# Altium PCB Copy of Main_Board.PcbDoc (part 4 of 4)
Units mil, origin at the board's own origin, x right, y up, seen from the top; angles counter-clockwise.
Board outline 5818.45 x 4760.12 mil, 4 copper layers (Top Layer, POWER, GROUND, Bottom Layer), stack 30.634 mil thick; 298 components, 323 nets, 1386 pads, 599 vias.
Unrouted connection lines stored in the file: 1.
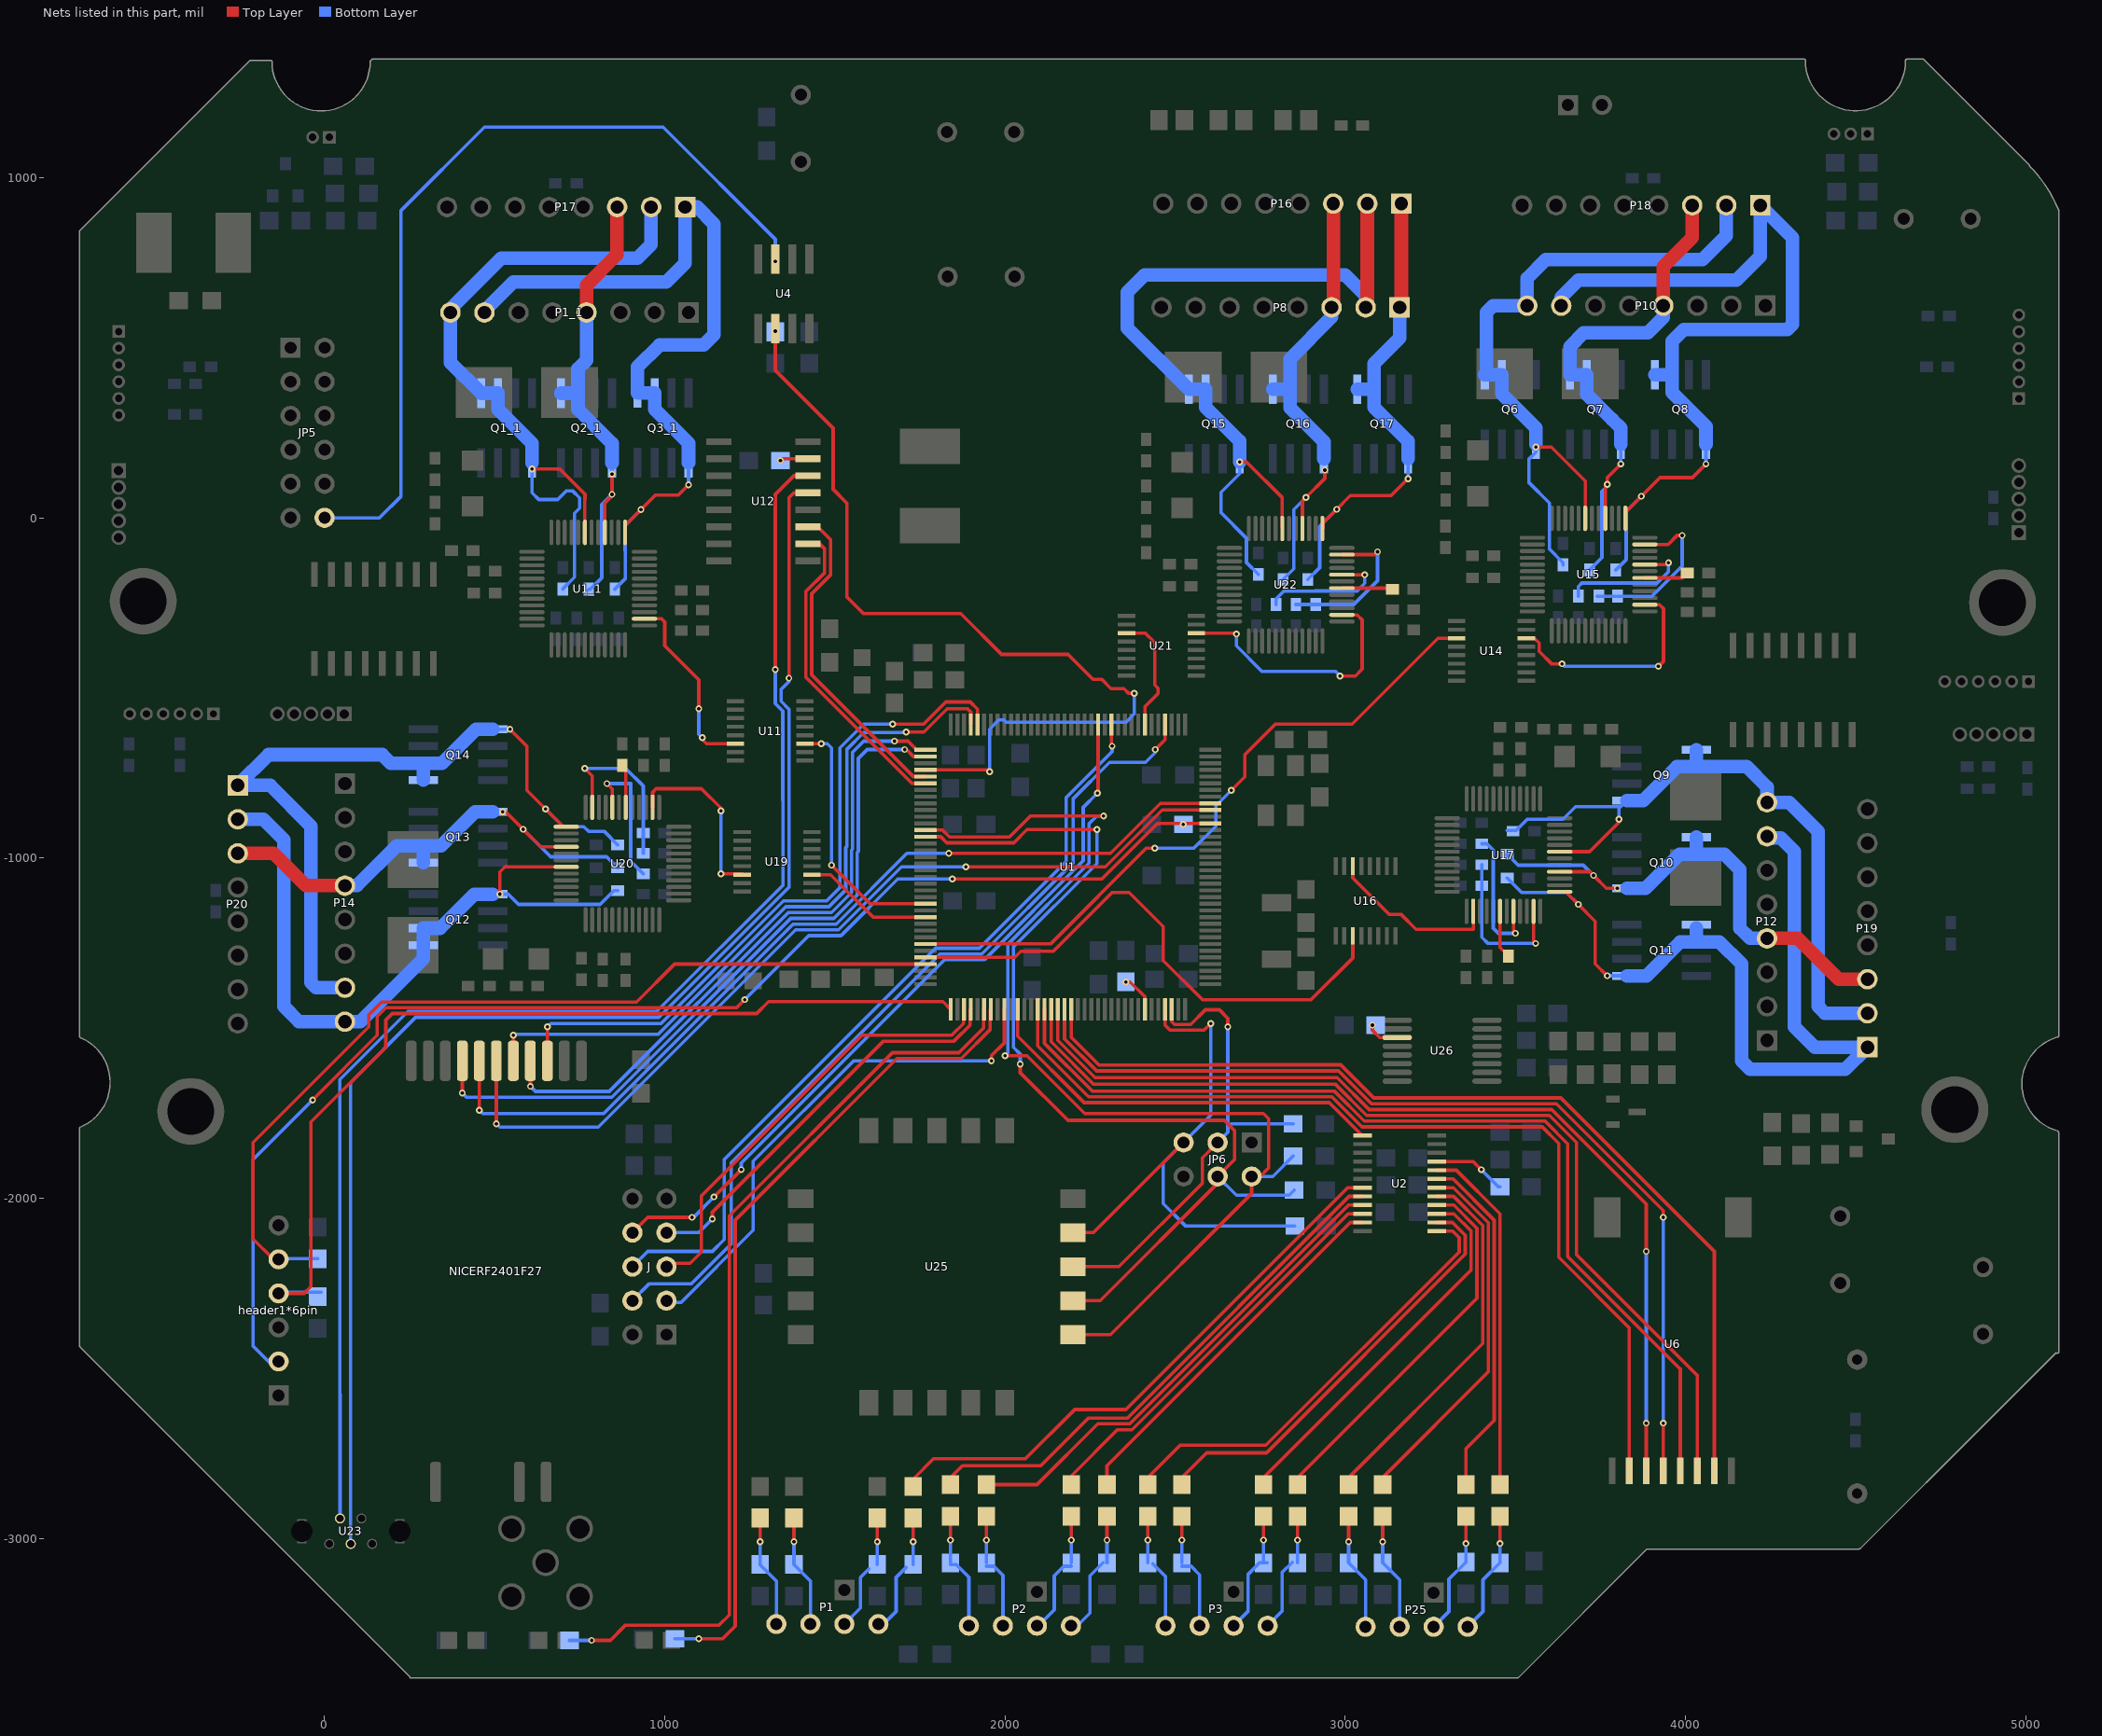
[diagram p6: the nets of this part, all layers, seen from the top]

## Via types
v1: diameter 20, hole 10, Top Layer to Bottom Layer, 507 vias
v2: diameter 25, hole 12, Top Layer to Bottom Layer, 48 vias
v3: diameter 60, hole 40, Top Layer to Bottom Layer, 40 vias
v4: diameter 30, hole 16, Top Layer to Bottom Layer, 3 vias
v5: diameter 32, hole 16, Top Layer to Bottom Layer, 1 vias

## Nets (pads, with @x,y where several pads share a name; then routed paths per layer and width w, separated by ;. In a path a pad name is that pad's centre, name@x,y a point inside that pad or via, vN(x,y) a via of type N, cw(c..) or ccw(c..) an arc to the next point about the centre after c; other vN are vias at no path point) (continued)
NetR28_2: R28.2 U2.7 | length 1696.8
  Top Layer w10: R28.2@1729.99,-2847.08 1729.99,-2826.38 1789.99,-2766.38 2059.99,-2766.38 2204.99,-2621.38 2354.99,-2621.38 3007.2,-1969.18 U2.7@3050.99,-1969.18
NetR29_2: R29.2 U2.8 | length 1574.1
  Top Layer w10: R29.2@1839.99,-2842.08 1839.99,-2821.38 1874.99,-2786.38 2104.99,-2786.38 2244.99,-2646.38 2359.99,-2646.38 3011.61,-1994.77 U2.8@3050.99,-1994.77
NetR30_2: R30.2 U2.9 | length 1446.4
  Top Layer w10: R30.2@1944.99,-2842.08 2094.29,-2842.08 2272.99,-2663.38 2367.03,-2663.38 3010.06,-2020.36 U2.9@3050.99,-2020.36
NetR31_2: R31.2 U2.10 | length 1200.8
  Top Layer w10: R31.2@2194.99,-2842.08 2194.99,-2816.38 2329.99,-2681.38 2373.08,-2681.38 3008.51,-2045.95 U2.10@3050.99,-2045.95
NetR32_2: R32.2 U2.11 | length 1102.8
  Top Layer w10: R32.2@2299.99,-2842.08 2299.99,-2786.38 3014.83,-2071.54 U2.11@3050.99,-2071.54
NetR36_1: R36.1 U2.16 | length 1118.2
  Top Layer w10: R36.1@2859.99,-2842.08 2859.99,-2821.38 3386.99,-2294.38 3386.99,-2088.38 3318.97,-2020.36 U2.16@3268.99,-2020.36
NetR37_1: R37.1 U2.15 | length 1120.3
  Top Layer w10: R37.1@2759.99,-2842.08 2759.99,-2821.38 3369.99,-2211.38 3369.99,-2096.38 3319.56,-2045.95 U2.15@3268.99,-2045.95
NetR38_1: R38.1 U2.14 | length 1280.5
  Top Layer w10: R38.1@2519.99,-2842.08 2519.99,-2821.38 2592.49,-2748.88 2768.45,-2748.88 3352.99,-2164.34 3352.99,-2109.38 3315.15,-2071.54 U2.14@3268.99,-2071.54
NetR39_1: R39.1 U2.13 | length 1326.3
  Top Layer w10: R39.1@2419.99,-2842.08 2419.99,-2821.38 2514.99,-2726.38 2766.91,-2726.38 3334.99,-2158.3 3334.99,-2116.38 3315.74,-2097.13 U2.13@3268.99,-2097.13
NetR42_1: R42.1 U2.21 | length 216.6
  Top Layer w10: U2.21@3268.99,-1892.41 3376.02,-1892.41 v1(3399.99,-1916.38)
  Bottom Layer w10: v1(3399.99,-1916.38) 3449.99,-1966.38 R42.1@3454.99,-1966.38
NetR51_1: R51.1 U26.3 | length 97.1
  Top Layer w10: v1(3079.99,-1491.38) 3079.99,-1506.38 3101.61,-1528 U26.3@3153.1,-1528
NetR63_1: R63.1 U15.20 | length 409.6
  Top Layer w10: U15.20@3880.82,-137.33 3944.99,-137.33 v1(3950.46,-131.85)
  Bottom Layer w10: R63.1@3685.46,-230.35 3685.46,-201.85 3695.46,-191.85 3916.42,-191.85 3950.46,-157.81 v1(3950.46,-131.85)
NetR64_2: R64.2 U15.18 | length 130.8
  Top Layer w10: U15.18@3880.82,-176.7 3990.62,-176.7 R64.2@4005.46,-161.85
NetR65_1: R65.1 R66.2 U15.23 | length 492.2
  Top Layer w10: U15.23@3880.82,-78.27 3949.05,-78.27 3975.46,-51.85 v1(3990.46,-51.85)
  Bottom Layer w10: R65.1@3740.46,-230.35 R65.1@3745.46,-230.35 R66.2@3795.46,-230.35 ; R66.2@3800.46,-230.35 3901.96,-230.35 3990.46,-141.85 v1(3990.46,-51.85)
NetR69_1: R69.1 U17.20 | length 409.2
  Top Layer w10: U17.20@3494.52,-1156.74 3494.52,-1215.91 v1(3499.99,-1221.38)
  Bottom Layer w10: R69.1@3401.49,-958.05 3416.66,-958.05 3434.99,-976.38 3434.99,-1206.38 3449.99,-1221.38 v1(3499.99,-1221.38)
NetR70_2: R70.2 U17.18 | length 141.9
  Top Layer w10: U17.18@3455.15,-1156.74 3455.15,-1263.54 R70.2@3479.99,-1288.38
NetR71_1: R71.1 R72.2 U17.23 | length 476.6
  Top Layer w10: U17.23@3553.57,-1156.74 3553.57,-1244.97 v1(3559.99,-1251.38)
  Bottom Layer w10: R71.1@3401.49,-1019.72 R72.2@3401.49,-1081.38 3401.49,-1232.88 3419.99,-1251.38 v1(3559.99,-1251.38)
NetR75_1: R75.1 U20.20 | length 427.3
  Top Layer w10: v1(829.99,-781.38) 845.74,-797.13 845.74,-851.38 U20.20@846.09,-851.03
  Bottom Layer w10: v1(829.99,-781.38) 899.99,-781.38 899.99,-1009.38 R75.1@936.99,-1046.38
NetR76_2: R76.2 U20.18 | length 127.5
  Top Layer w10: R76.2@874.99,-727.88 885.46,-738.35 U20.18@885.46,-851.03
NetR77_1: R77.1 R78.2 U20.23 | length 515.3
  Top Layer w10: v1(764.99,-736.38) 787.04,-758.43 U20.23@787.04,-851.03
  Bottom Layer w10: v1(764.99,-736.38) 884.99,-736.38 936.99,-788.38 R78.2@936.99,-926.38 R77.1@936.99,-986.38
NetR81_1: R81.1 U22.20 | length 389
  Top Layer w10: U22.20@2990.35,-167.24 v1(3057.63,-167.24)
  Bottom Layer w10: R81.1@2796.66,-254.88 2796.66,-238.22 2819.49,-215.38 2911.71,-215.38 2912.21,-214.88 3034.99,-214.88 3057.63,-192.24 v1(3057.63,-167.24)
NetR82_2: R82.2 U22.18 | length 149.5
  Top Layer w10: U22.18@2990.35,-206.61 3135.22,-206.61 R82.2@3138.49,-209.88
NetR83_1: R83.1 R84.2 U22.23 | length 462.1
  Top Layer w10: U22.23@2990.35,-108.19 3086.68,-108.19 v1(3094.99,-99.88)
  Bottom Layer w10: R83.1@2854.99,-254.88 R84.2@2913.33,-254.88 3024.99,-254.88 3094.99,-184.88 v1(3094.99,-99.88)
NetR98_2: R98.2 U12.7 | length 83.1
  Top Layer w10: v1(1339.99,168.62) 1344.99,173.62 U12.7@1420.99,173.62
NetR101_1: R101.1 U1.138 | length 111.3
  Top Layer w10: v1(2354.99,-1364.38) 2367.99,-1364.38 2411.37,-1407.76 U1.138@2411.37,-1444.69
NetR107_1: R107.1 U2.17 | length 1095.4
  Top Layer w10: R107.1@3009.99,-2842.08 3009.99,-2821.38 3403.99,-2427.38 3403.99,-2080.38 3318.38,-1994.77 U2.17@3268.99,-1994.77
NetR108_1: R108.1 U2.18 | length 1093.3
  Top Layer w10: R108.1@3109.99,-2842.08 3109.99,-2821.38 3420.99,-2510.38 3420.99,-2072.38 3317.79,-1969.18 U2.18@3268.99,-1969.18
NetR109_1: R109.1 U2.19 | length 1031.1
  Top Layer w10: U2.19@3268.99,-1943.59 3317.2,-1943.59 3437.99,-2064.38 3437.99,-2653.38 3354.99,-2736.38 R109.1@3354.99,-2842.08
NetR110_1: R110.1 U2.20 | length 1034.9
  Top Layer w10: U2.20@3268.99,-1918 3326.61,-1918 3454.99,-2046.38 R110.1@3454.99,-2842.08
NRST: header1*6pin.2 R35.1 U1.25 | length 3911.8
  Top Layer w10: v1(-35.01,-1711.38) 154.99,-1521.38 154.99,-1466.38 180.99,-1440.38 1210.99,-1440.38 v1(1234.99,-1416.38) ; v1(1844.99,-1061.38) 2284.99,-1061.38 2447.94,-898.43 U1.25@2603.3,-898.43
  Bottom Layer w10: header1*6pin.2@-130.01,-2464.38 -137.05,-2464.38 -147.01,-2474.34 -147.01,-2480 -165,-2480 -210.01,-2434.99 -210.01,-1886.38 v1(-35.01,-1711.38) ; v1(1234.99,-1416.38) 1422.99,-1228.38 1517.99,-1228.38 1684.99,-1061.38 v1(1844.99,-1061.38)
  other v1: 2523.99,-901.38
PCA9539_I\N\T\: U1.119 U2.1 | length 1213.6
  Top Layer w10: U1.119@2037.35,-1444.69 2037.35,-1523.74 2232.73,-1719.12 2953.48,-1719.12 3049.99,-1815.63 U2.1@3050.99,-1815.63
PWM_1: U1.96 U11.11 | length 751.3
  Top Layer w10: U11.11@1412.49,-663.88 v1(1459.99,-663.88) ; v1(1489.99,-1021.38) 1603.26,-1134.65 U1.96@1766.68,-1134.65
  Bottom Layer w10: v1(1459.99,-663.88) 1477.49,-663.88 1489.99,-676.38 v1(1489.99,-1021.38)
PWM_1_V: U1_1.14 U11.6 | length 556.8
  Top Layer w10: U1_1.14@940.35,-296.85 990.46,-296.85 999.99,-306.38 999.99,-376.38 1099.99,-476.38 v1(1099.99,-561.38) ; v1(1109.99,-646.38) 1109.99,-651.38 1122.49,-663.88 U11.6@1207.49,-663.88
  Bottom Layer w10: v1(1099.99,-561.38) 1099.99,-636.38 v1(1109.99,-646.38)
PWM_2: U1.102 U14.11 | length 2006.4
  Top Layer w10: U1.102@1766.68,-1252.76 2133.61,-1252.76 2414.99,-971.38 v1(2439.99,-971.38) ; v1(2664.99,-801.38) 2704.99,-761.38 2704.99,-696.38 2794.99,-606.38 3019.99,-606.38 3272.49,-353.88 U14.11@3327.49,-353.88
  Bottom Layer w10: v1(2439.99,-971.38) 2554.99,-971.38 2619.99,-906.38 2619.99,-846.38 v1(2664.99,-801.38)
PWM_2_V: U14.6 U15.14 | length 672.3
  Top Layer w10: U14.6@3532.49,-353.88 3555.96,-353.88 3569.99,-367.91 3569.99,-392.49 3606.62,-429.12 v1(3637.73,-429.12) ; U15.14@3880.82,-255.44 3924.05,-255.44 3935.46,-266.85 3935.46,-421.85 v1(3920.46,-436.85)
  Bottom Layer w10: v1(3637.73,-429.12) 3645.46,-436.85 v1(3920.46,-436.85)
PWM_3: U1.104 U16.11 | length 1639.6
  Top Layer w10: U1.104@1766.68,-1292.13 2029.13,-1292.13 2046.88,-1274.38 2141.99,-1274.38 2314.99,-1101.38 2364.99,-1101.38 2464.99,-1201.38 2464.99,-1301.38 2579.99,-1416.38 2899.99,-1416.38 3022.49,-1293.88 U16.11@3022.49,-1228.88
PWM_3_V: U16.6 U17.14 | length 504.7
  Top Layer w10: U16.6@3022.49,-1023.88 3022.49,-1058.88 3129.99,-1166.38 3164.99,-1166.38 3208.57,-1209.97 3376.41,-1209.97 U17.14@3376.41,-1156.74
PWM_4: U1.98 U19.11 | length 390.9
  Top Layer w10: U19.11@1427.53,-1049.18 1487.79,-1049.18 1612.63,-1174.02 U1.98@1766.68,-1174.02
PWM_4_V: U19.6 U20.14 | length 534.2
  Top Layer w10: U20.14@964.2,-851.03 964.2,-807.17 974.99,-796.38 1107.79,-796.38 1164.99,-853.59 v1(1164.99,-861.38) ; v1(1164.99,-1046.38) 1229.66,-1046.38 U19.6@1232.45,-1049.18
  Bottom Layer w10: v1(1164.99,-1046.38) v1(1164.99,-861.38)
PWM_d: U1.43 U21.11 | length 355.7
  Top Layer w10: U21.11@2357.49,-338.88 2412.49,-338.88 2439.99,-366.38 2439.99,-491.38 2449.99,-501.38 2449.99,-516.38 2411.37,-555 U1.43@2411.37,-608.08
PWM_d_V: U21.6 U22.14 | length 779.1
  Top Layer w10: U21.6@2562.49,-338.88 2677.49,-338.88 v1(2679.99,-341.38) ; v1(2984.99,-464.88) 3029.99,-464.88 3049.99,-444.88 3049.99,-299.88 3035.46,-285.35 U22.14@2990.35,-285.35
  Bottom Layer w10: v1(2679.99,-341.38) 2679.99,-376.38 2754.99,-451.38 2971.49,-451.38 v1(2984.99,-464.88)
RX_COM: R124.1 U1.115 | length 2428
  Top Layer w10: v1(1099.99,-3295.08) 1169.99,-3295.08 1206.99,-3258.08 1206.99,-2064.38 1681.99,-1589.38 1871.38,-1589.38 1956.83,-1503.92 1956.83,-1446.47 U1.115@1958.61,-1444.69
  Bottom Layer w10: R124.1@1029.99,-3295.08 v1(1099.99,-3295.08)
S1: P1.2 R14.1 R25.1 | length 331.8
  Top Layer w10: v1(1279.99,-3010.08) R25.1@1279.99,-2940.08
  Bottom Layer w10: v1(1279.99,-3010.08) R14.1@1279.99,-3077.08 1327.99,-3125.08 P1.2@1327.99,-3251.98
S2: P1.3 R13.1 R26.1 | length 331.8
  Top Layer w10: v1(1379.99,-3010.08) R26.1@1379.99,-2940.08
  Bottom Layer w10: v1(1379.99,-3010.08) R13.1@1379.99,-3077.08 1427.99,-3125.08 P1.3@1427.99,-3251.98
S3: P1.4 R12.1 R27.1 | length 328.7
  Top Layer w10: v1(1624.99,-3010.08) R27.1@1624.99,-2940.08
  Bottom Layer w10: P1.4@1527.99,-3251.98 1574.89,-3205.08 1574.89,-3115.18 R12.1@1599.99,-3090.08 ; R12.1@1624.99,-3077.08 v1(1624.99,-3010.08)
S4: P1.5 R11.1 R28.1 | length 346.7
  Top Layer w10: v1(1729.99,-3010.08) R28.1@1729.99,-2940.08
  Bottom Layer w10: P1.5@1627.99,-3251.98 1643.09,-3251.98 1679.99,-3215.08 1679.99,-3115.08 R11.1@1709.99,-3085.08 ; R11.1@1729.99,-3077.08 v1(1729.99,-3010.08)
S5: P2.2 R18.1 R29.1 | length 349.2
  Top Layer w10: v1(1839.99,-3005.08) R29.1@1839.99,-2935.08
  Bottom Layer w10: R18.1@1839.99,-3077.08 1856.99,-3077.08 1893.99,-3114.08 P2.2@1893.99,-3256.98 ; R18.1@1839.99,-3072.08 v1(1839.99,-3005.08)
S6: P2.3 R17.1 R30.1 | length 345.1
  Top Layer w10: v1(1944.99,-3005.08) R30.1@1944.99,-2935.08
  Bottom Layer w10: R17.1@1944.99,-3082.08 1966.99,-3082.08 1993.99,-3109.08 P2.3@1993.99,-3256.98 ; R17.1@1944.99,-3072.08 v1(1944.99,-3005.08)
S7: P2.4 R16.1 R31.1 | length 387
  Top Layer w10: P2.4@2093.99,-3256.98 P2.4@2111.99,-3256.98 ; v1(2194.99,-3005.08) R31.1@2194.99,-2935.08
  Bottom Layer w10: P2.4@2093.99,-3256.98 2098.09,-3256.98 2144.99,-3210.08 2144.99,-3110.08 2172.99,-3082.08 R16.1@2194.99,-3082.08 ; R16.1@2194.99,-3072.08 v1(2194.99,-3005.08)
S8: P2.5 R15.1 R32.1 | length 395
  Top Layer w10: P2.5@2193.99,-3256.98 P2.5@2216.99,-3256.98 ; v1(2299.99,-3005.08) R32.1@2299.99,-2935.08
  Bottom Layer w10: P2.5@2193.99,-3256.98 2213.09,-3256.98 2249.99,-3220.08 2249.99,-3110.08 R15.1@2287.99,-3072.08 ; R15.1@2299.99,-3072.08 v1(2299.99,-3005.08)
S9: P3.2 R22.1 R39.2 | length 334.2
  Top Layer w10: v1(2419.99,-3005.08) R39.2@2419.99,-2935.08
  Bottom Layer w10: R22.1@2419.99,-3072.08 v1(2419.99,-3005.08) ; R22.1@2434.99,-3075.08 2471.99,-3112.08 P3.2@2471.99,-3256.98
S10: P3.3 R21.1 R38.2 | length 349.3
  Top Layer w10: v1(2519.99,-3005.08) R38.2@2519.99,-2935.08
  Bottom Layer w10: R21.1@2519.99,-3082.08 2546.99,-3082.08 2571.99,-3107.08 P3.3@2571.99,-3256.98 ; R21.1@2519.99,-3072.08 v1(2519.99,-3005.08)
S11: P3.4 R20.1 R37.2 | length 399.4
  Top Layer w10: P3.4@2669.99,-3256.98 P3.4@2671.99,-3256.98 P3.4@2693.99,-3256.98 ; v1(2759.99,-3005.08) R37.2@2759.99,-2935.08
  Bottom Layer w10: P3.4@2671.99,-3256.98 2714.99,-3213.98 2714.99,-3105.08 2747.99,-3072.08 R20.1@2769.99,-3072.08 ; R20.1@2759.99,-3072.08 v1(2759.99,-3005.08)
S12: P3.5 R19.1 R36.2 | length 354.1
  Top Layer w10: v1(2859.99,-3005.08) R36.2@2859.99,-2935.08
  Bottom Layer w10: P3.5@2771.99,-3256.98 2814.99,-3213.98 2814.99,-3100.08 R19.1@2844.99,-3070.08 ; R19.1@2859.99,-3072.08 v1(2859.99,-3005.08)
S13: P25.2 R106.1 R107.2 | length 345.7
  Top Layer w10: v1(3009.99,-3010.08) R107.2@3009.99,-2935.08
  Bottom Layer w10: v1(3009.99,-3010.08) R106.1@3009.99,-3072.08 3059.99,-3122.08 P25.2@3059.99,-3260.08
S14: P25.3 R105.1 R108.2 | length 345.7
  Top Layer w10: v1(3109.99,-3010.08) R108.2@3109.99,-2935.08
  Bottom Layer w10: v1(3109.99,-3010.08) R105.1@3109.99,-3072.08 3159.99,-3122.08 P25.3@3159.99,-3260.08
S15: P25.4 R104.1 R109.2 | length 364.4
  Top Layer w10: v1(3354.99,-3015.08) R109.2@3354.99,-2935.08
  Bottom Layer w10: P25.4@3259.99,-3260.08 3304.99,-3215.08 3304.99,-3120.08 R104.1@3354.99,-3070.08 v1(3354.99,-3015.08)
S16: P25.5 R103.1 R110.2 | length 364.4
  Top Layer w10: v1(3454.99,-3015.08) R110.2@3454.99,-2935.08
  Bottom Layer w10: P25.5@3359.99,-3260.08 3404.99,-3215.08 3404.99,-3122.08 R103.1@3454.99,-3072.08 v1(3454.99,-3015.08)
Shoot: R46.2 U1.76 U4.2 | length 2663.2
  Top Layer w10: U4.2@1324.99,556.26 1324.99,433.62 1494.99,263.62 1494.99,83.62 1534.99,43.62 1534.99,-232.34 1584.03,-281.38 1869.99,-281.38 1989.99,-401.38 2184.99,-401.38 2257.99,-474.38 2284.1,-474.38 2311.84,-502.11 2349.79,-502.11 2364.06,-516.38 v1(2379.99,-516.38) ; U1.76@1766.68,-740.95 1949.56,-740.95 v1(1954.99,-746.38)
  Bottom Layer w10: v1(1954.99,-746.38) 1954.99,-621.38 1981.99,-594.38 1997.03,-594.38 2004.03,-601.38 2354.99,-601.38 2379.99,-576.38 v1(2379.99,-516.38)
  other v1: 1324.99,548.62
Shoot_V: JP5.12 U4.7 | length 2494.5
  Bottom Layer w10: JP5.12@0,0 161.37,0 224.99,63.62 224.99,903.62 469.99,1148.62 994.99,1148.62 1324.99,818.62 v1(1324.99,753.62)
SPI_CE_1: U1.122 U6.2 | length 2806.1
  Top Layer w10: U1.122@2096.41,-1444.69 2096.41,-1552.8 2245.73,-1702.12 2960.52,-1702.12 3049,-1790.6 3579.21,-1790.6 3627.49,-1838.88 3627.49,-2173.88 3834.99,-2381.38 U6.2@3834.99,-2801.38
SPI_CE_2: NICERF2401F27.3 U1.68 | length 2054.7
  Top Layer w10: NICERF2401F27.3@654.99,-1596.38 v1(654.99,-1496.38) ; v1(1669.99,-606.38) 1760.95,-606.38 1825.95,-541.38 1898.01,-541.38 1919.24,-562.62 U1.68@1919.24,-608.08
  Bottom Layer w10: v1(654.99,-1496.38) 664.99,-1486.38 989.03,-1486.38 1349.03,-1126.38 1475.74,-1126.38 1514.99,-1087.13 1514.99,-676.38 1584.99,-606.38 v1(1669.99,-606.38)
SPI_CE_3: J.3 U1.117 | length 1537.6
  Top Layer w10: v1(1959.99,-1596.38) 1959.99,-1581.38 1997.98,-1543.39 U1.117@1997.98,-1444.69
  Bottom Layer w10: J.3@1004.99,-2301.38 1009.99,-2306.38 1048.15,-2306.38 1259.99,-2094.54 1259.99,-1891.38 1554.99,-1596.38 v1(1959.99,-1596.38)
SPI_IRQ_1: U1.127 U6.7 | length 2878.5
  Top Layer w10: U1.127@2194.83,-1444.69 2194.83,-1527.34 2275.88,-1608.38 2609.31,-1608.38 2609.53,-1608.17 2986.78,-1608.17 3084.21,-1705.6 3634.21,-1705.6 4084.99,-2156.38 U6.7@4084.99,-2801.38
SPI_IRQ_2: NICERF2401F27.8 U1.74 | length 2126.4
  Top Layer w10: v1(404.99,-1691.38) NICERF2401F27.8@404.99,-1596.38 ; v1(1704.99,-681.38) 1710.82,-681.38 1731.01,-701.58 U1.74@1766.68,-701.58
  Bottom Layer w10: v1(404.99,-1691.38) 416.99,-1703.38 844.16,-1703.38 1370.16,-1177.38 1496.87,-1177.38 1565.99,-1108.26 1565.99,-983.47 1568.99,-980.47 1568.99,-707.38 1594.99,-681.38 v1(1704.99,-681.38)
SPI_IRQ_3: J.8 U1.50 | length 2207.8
  Top Layer w10: J.8@904.99,-2101.38 949.99,-2056.38 v1(1079.99,-2056.38) ; v1(1144.99,-1996.38) v1(1224.99,-1916.38) ; v1(2271.8,-809.58) 2273.57,-807.8 U1.50@2273.57,-608.08
  Bottom Layer w10: v1(1079.99,-2056.38) 1084.99,-2056.38 v1(1144.99,-1996.38) ; v1(1224.99,-1916.38) 1224.99,-1896.38 1821.99,-1299.38 1938.91,-1299.38 2229.99,-1008.3 2229.99,-851.38 v1(2271.8,-809.58)
SPI_MISO_1: U1.124 U6.6 | length 2874.6
  Top Layer w10: U1.124@2135.78,-1444.69 2135.78,-1540.41 2260.81,-1665.44 2971.92,-1665.44 3063.09,-1756.6 3600.21,-1756.6 3679.99,-1836.38 3679.99,-2166.38 4034.99,-2521.38 U6.6@4034.99,-2801.38
SPI_MISO_2: NICERF2401F27.7 U1.28 | length 2675.2
  Top Layer w10: v1(454.99,-1741.38) NICERF2401F27.7@454.99,-1596.38 ; v1(1834.99,-986.38) 2309.99,-986.38 2457,-839.37 U1.28@2603.3,-839.37
  Bottom Layer w10: v1(454.99,-1741.38) 464.99,-1751.38 820.2,-1751.38 1377.2,-1194.38 1503.91,-1194.38 1711.91,-986.38 v1(1834.99,-986.38)
SPI_MISO_3: J.7 U1.112 | length 1205.3
  Top Layer w10: v1(1139.99,-2061.38) 1139.99,-2041.38 1642.99,-1538.38 1850.25,-1538.38 1897.78,-1490.85 1897.78,-1444.69 U1.112@1899.56,-1444.69
  Bottom Layer w10: J.7@1004.99,-2101.38 1099.99,-2101.38 v1(1139.99,-2061.38)
SPI_MOSI_1: U1.123 U6.5 | length 2858
  Top Layer w10: U1.123@2116.09,-1444.69 2116.09,-1544.76 2256.45,-1685.12 2967.57,-1685.12 3056.04,-1773.6 3587.21,-1773.6 3653.74,-1840.13 3653.74,-2171.38 3983.74,-2501.38 ; U6.5@3984.99,-2801.38 3984.99,-2501.38
SPI_MOSI_2: NICERF2401F27.6 U1.27 | length 2673.6
  Top Layer w10: v1(504.99,-1781.38) NICERF2401F27.6@504.99,-1596.38 ; v1(1884.99,-1026.38) 2294.99,-1026.38 2462.32,-859.06 U1.27@2603.3,-859.06
  Bottom Layer w10: v1(504.99,-1781.38) 514.99,-1791.38 804.24,-1791.38 1384.24,-1211.38 1510.95,-1211.38 1695.95,-1026.38 v1(1884.99,-1026.38)
SPI_MOSI_3: J.6 U1.48 | length 2365
  Top Layer w10: U1.48@2312.94,-608.08 2312.94,-669.33 v1(2314.99,-671.38)
  Bottom Layer w10: J.6@904.99,-2201.38 949.99,-2156.38 1139.99,-2156.38 1174.99,-2121.38 1174.99,-1886.38 1795.99,-1265.38 1924.83,-1265.38 2179.99,-1010.22 2179.99,-822.34 2314.99,-687.34 v1(2314.99,-671.38)
SPI_NSS_1: U1.125 U6.3 | length 2804.3
  Top Layer w10: U1.125@2155.46,-1444.69 2155.46,-1536.05 2265.17,-1645.75 2976.28,-1645.75 3070.13,-1739.6 3607.25,-1739.6 3884.99,-2017.34 v1(3884.99,-2156.38) ; U6.3@3884.99,-2801.38 v1(3884.99,-2661.38)
  Bottom Layer w10: v1(3884.99,-2661.38) v1(3884.99,-2156.38)
SPI_NSS_2: NICERF2401F27.4 U1.73 | length 1919.6
  Top Layer w10: v1(604.99,-1671.38) NICERF2401F27.4@604.99,-1596.38 ; v1(1674.99,-656.38) 1714.99,-656.38 1740.5,-681.89 U1.73@1766.68,-681.89
  Bottom Layer w10: v1(604.99,-1671.38) 619.99,-1686.38 837.12,-1686.38 1363.12,-1160.38 1489.83,-1160.38 1548.99,-1101.22 1548.99,-976.42 1551.99,-973.42 1551.99,-689.38 1584.99,-656.38 v1(1674.99,-656.38)
SPI_NSS_3: J.4 U1.40 | length 2547.9
  Top Layer w10: v1(2441.6,-681.38) 2470.43,-652.56 U1.40@2470.43,-608.08
  Bottom Layer w10: J.4@904.99,-2301.38 954.99,-2251.38 1079.1,-2251.38 1194.99,-2135.49 1194.99,-1896.38 1808.99,-1282.38 1931.87,-1282.38 2199.99,-1014.26 2199.99,-826.38 2307.58,-718.79 2412.58,-718.79 2441.6,-689.78 v1(2441.6,-681.38)
SPI_SCK_1: U1.126 U6.4 | length 2820.9
  Top Layer w10: U1.126@2175.15,-1444.69 2175.15,-1531.69 2269.52,-1626.07 2980.64,-1626.07 3077.17,-1722.6 3621.21,-1722.6 3934.99,-2036.38 v1(3934.99,-2056.38) ; U6.4@3934.99,-2801.38 v1(3934.99,-2661.38)
  Bottom Layer w10: v1(3934.99,-2661.38) v1(3934.99,-2056.38)
SPI_SCK_2: NICERF2401F27.5 U1.69 | length 2098.4
  Top Layer w10: NICERF2401F27.5@554.99,-1596.38 v1(554.99,-1521.38) ; v1(1709.49,-629.88) 1761.49,-629.88 1829.99,-561.38 1889.99,-561.38 1899.56,-570.95 U1.69@1899.56,-608.08
  Bottom Layer w10: v1(554.99,-1521.38) 557.99,-1518.38 981.08,-1518.38 1356.08,-1143.38 1482.78,-1143.38 1531.99,-1094.17 1531.99,-969.38 1534.99,-966.38 1534.99,-681.38 1584.99,-631.38 1707.99,-631.38 v1(1709.49,-629.88)
SPI_SCK_3: J.5 U1.111 | length 1309.5
  Top Layer w10: J.5@1004.99,-2201.38 1014.99,-2191.38 1074.99,-2191.38 1107.99,-2158.38 1107.99,-1993.38 1579.99,-1521.38 1843.21,-1521.38 1878.09,-1486.5 1878.09,-1444.69 U1.111@1879.87,-1444.69
SWD_SWCLK: header1*6pin.4 R94.2 U1.109 | length 2796.6
  Top Layer w10: header1*6pin.4@-135,-2280 -60,-2280 -40.01,-2260.01 -40.01,-1776.38 179.99,-1556.38 179.99,-1476.38 198.99,-1457.38 1269.99,-1457.38 1304.99,-1422.38 1818.2,-1422.38 U1.109@1840.5,-1444.69
  Bottom Layer w10: header1*6pin.4@-135,-2280 -131.38,-2276.38 R94.2@-10.01,-2276.38
SWD_SWDIO: header1*6pin.5 R93.2 U1.105 | length 2713.8
  Top Layer w10: header1*6pin.5@-135,-2180 -150.01,-2180 -210.01,-2120 -210.01,-1836.38 129.99,-1496.38 129.99,-1461.38 167.99,-1423.38 917.03,-1423.38 1028.6,-1311.82 U1.105@1766.68,-1311.82
  Bottom Layer w10: header1*6pin.5@-135,-2180 -133,-2178 R93.2@-20,-2178
TX_COM: R33.1 U1.114 | length 2707.2
  Top Layer w10: v1(784.99,-3300.08) 839.99,-3300.08 884.99,-3255.08 1159.99,-3255.08 1189.99,-3225.08 1189.99,-2051.38 1668.99,-1572.38 1864.33,-1572.38 1937.15,-1499.57 1937.15,-1444.69 U1.114@1938.93,-1444.69
  Bottom Layer w10: R33.1@719.99,-3300.08 v1(784.99,-3300.08)
U_1: C8_1.1 P1_1.7 P17.1 Q3_1.1 Q3_1.5 Q3_1.6 U1_1.25 | length 2473.4
  Top Layer w10: U1_1.25@883.26,-42.92 U1_1.25@883.26,-21.38 ; U1_1.25@884.48,-21.38 v1(929.99,24.13) 972.59,66.73 1039.99,66.73 v1(1069.99,96.73)
  Bottom Layer w10: C8_1.1@853.15,-209.77 883.65,-179.27 883.65,-96.93 883.26,-96.54 883.26,-22.6 v1(929.99,24.13) ; v1(1069.99,96.73) Q3_1.1@1069.99,162
  Bottom Layer w40: P1_1.7@469.99,603.62 469.99,608.62 554.99,693.62 1004.99,693.62 1059.99,748.62 P17.1@1059.99,913.62 1094.99,913.62 1144.99,863.62 1144.99,538.62 1114.99,508.62 984.99,508.62 919.99,443.62 Q3_1.5@919.99,366.73 Q3_1.6@969.99,366.73 969.99,319.18 1069.99,219.18 Q3_1.1@1069.99,162
U_2: C52.1 P10.7 P18.1 Q8.1 Q8.5 Q8.6 U15.25 | length 2587.4
  Top Layer w10: U15.25@3823.73,-1.5 3823.73,16.41 v1(3870.46,63.15) 3925.46,118.15 4020.46,118.15 v1(4060.46,158.15)
  Bottom Layer w10: C52.1@3795.46,-153.35 3825.96,-122.85 3825.96,18.65 v1(3870.46,63.15) ; v1(4060.46,158.15) Q8.1@4060.46,216.26
  Bottom Layer w40: P10.7@3634.99,623.62 3634.99,648.62 3684.99,698.62 4149.99,698.62 4219.99,768.62 P18.1@4219.99,918.62 4314.99,823.62 4314.99,568.62 4299.99,553.62 3994.99,553.62 3960.46,519.09 Q8.6@3960.46,420.98 ; Q8.5@3910.46,420.98 Q8.6@3960.46,420.98 ; Q8.1@4060.46,216.26 4060.46,268.15 3960.46,368.15 Q8.6@3960.46,420.98
U_3: C64.1 P12.7 P19.1 Q11.1 Q11.5 Q11.6 U17.25 | length 2611.3
  Top Layer w10: U17.25@3630.35,-1099.65 3649.99,-1099.65 3649.99,-1101.38 v1(3684.99,-1136.38) 3734.99,-1186.38 3734.99,-1311.38 v1(3769.99,-1346.38)
  Bottom Layer w10: C64.1@3475.99,-1058.88 3518.49,-1101.38 3649.99,-1101.38 v1(3684.99,-1136.38) ; v1@3764.99,-1346.38 v1(3769.99,-1346.38) Q11.1@3827.87,-1346.38
  Bottom Layer w40: Q11.1@3827.87,-1346.38 3884.99,-1346.38 3984.99,-1246.38 Q11.6@4032.59,-1246.38 ; Q11.5@4032.59,-1206.38 Q11.6@4032.59,-1246.38 ; P12.7@4239.99,-936.38 4244.99,-941.38 4279.99,-941.38 4319.99,-981.38 4319.99,-1496.38 4379.99,-1556.38 P19.1@4534.99,-1556.38 4469.99,-1621.38 4189.99,-1621.38 4164.99,-1596.38 4164.99,-1311.38 4099.99,-1246.38 Q11.6@4032.59,-1246.38
U_4: C76.1 P14.7 P20.1 Q14.1 Q14.5 Q14.6 U20.25 | length 2390.2
  Top Layer w10: v1(544.99,-621.38) 594.99,-671.38 594.99,-801.38 v1(649.99,-856.38) 701.72,-908.11 U20.25@710.27,-908.11
  Bottom Layer w10: Q14.1@494.99,-621.38 v1(544.99,-621.38) v1@549.99,-621.38 ; v1(649.99,-856.38) 701.72,-908.11 762.22,-908.11 775.49,-921.38 821.49,-921.38 C76.1@861.49,-961.38
  Bottom Layer w40: P14.7@59.99,-1381.38 -25.01,-1381.38 -40.01,-1366.38 -40.01,-906.38 -160.01,-786.38 P20.1@-255.01,-786.38 -165.01,-696.38 169.99,-696.38 194.99,-721.38 Q14.6@290.27,-721.38 ; Q14.5@290.27,-771.38 Q14.6@290.27,-721.38 ; Q14.1@494.99,-621.38 444.99,-621.38 344.99,-721.38 Q14.6@290.27,-721.38
U_d: C89.1 P8.1 P16.1 Q17.1 Q17.5 Q17.6 U22.25 | length 1495.4
  Top Layer w10: U22.25@2934.48,-31.42 2934.48,-15.39 v1(2974.99,25.12) 3014.99,65.12 3134.99,65.12 v1(3184.99,115.12)
  Top Layer w40: P8.1@3159.99,618.62 3164.99,623.62 P16.1@3164.99,923.62
  Bottom Layer w10: C89.1@2889.99,-181.38 2924.99,-146.38 2924.99,-24.88 v1(2974.99,25.12) ; v1(3184.99,115.12) Q17.1@3184.99,173.5
  Bottom Layer w40: Q17.5@3034.99,378.23 Q17.6@3084.99,378.23 ; P8.1@3159.99,618.62 3159.99,528.62 3084.99,453.62 Q17.6@3084.99,378.23 ; Q17.1@3184.99,173.5 3184.99,225.12 3084.99,325.12 Q17.6@3084.99,378.23
UART8_CTS: JP6.2 R120.1 U1.85 U25.11 | length 3345
  Top Layer w10: U1.85@1766.68,-918.11 1816.72,-918.11 1836.99,-938.38 2012.99,-938.38 2074.99,-876.38 v1(2289.99,-876.38) ; v1(1999.99,-1581.38) 2064.99,-1581.38 2234.99,-1751.38 2759.99,-1751.38 2774.99,-1766.38 2774.99,-1911.38 2749.99,-1936.38 JP6.2@2724.99,-1936.38 2724.99,-1986.38 2309.99,-2401.38 U25.11@2199.99,-2401.38
  Bottom Layer w10: v1(1999.99,-1581.38) 2007.99,-1573.38 2007.99,-1254.34 2246.99,-1015.34 2246.99,-899.38 2269.99,-876.38 v1(2289.99,-876.38) ; JP6.2@2724.99,-1936.38 2786.99,-1936.38 R120.1@2846.99,-1876.38
UART8_RTS: JP6.4 R121.1 U1.86 U25.12 | length 3049.5
  Top Layer w10: U1.86@1766.68,-937.8 1811.41,-937.8 1828.99,-955.38 2025.99,-955.38 2064.99,-916.38 v1(2269.99,-916.38) ; v1(2044.99,-1606.38) 2044.99,-1631.38 2184.99,-1771.38 2644.99,-1771.38 2674.99,-1801.38 2674.99,-1886.38 JP6.4@2624.99,-1936.38 2624.99,-1956.38 2279.99,-2301.38 U25.12@2199.99,-2301.38
  Bottom Layer w10: v1(2044.99,-1606.38) 2044.99,-1576.38 2024.99,-1556.38 2024.99,-1261.38 2269.99,-1016.38 v1(2269.99,-916.38) ; JP6.4@2624.99,-1936.38 2679.99,-1991.38 2834.99,-1991.38 R121.1@2849.99,-1976.38
UART8_RX: JP6.5 R123.1 U1.141 U25.14 | length 1632.5
  Top Layer w10: U25.14@2199.99,-2101.38 2259.99,-2101.38 JP6.5@2524.99,-1836.38 ; U1.141@2470.43,-1444.69 2470.43,-1491.82 2484.78,-1506.17 2585.2,-1506.17 v1(2604.99,-1486.38)
  Bottom Layer w10: v1(2604.99,-1486.38) 2604.99,-1756.38 JP6.5@2524.99,-1836.38 2464.99,-1896.38 2464.99,-2016.38 2529.99,-2081.38 R123.1@2851.99,-2081.38
UART8_TX: JP6.3 R122.1 U1.142 U25.13 | length 1426.6
  Top Layer w10: U25.13@2199.99,-2201.38 2334.99,-2201.38 2579.99,-1956.38 2579.99,-1881.38 JP6.3@2624.99,-1836.38 ; U1.142@2490.11,-1444.69 2490.11,-1481.5 2497.78,-1489.17 2546.09,-1489.17 2588.88,-1446.38 2629.99,-1446.38 2654.99,-1471.38 v1(2654.99,-1496.38)
  Bottom Layer w10: JP6.3@2624.99,-1836.38 2654.99,-1806.38 2654.99,-1791.38 ; v1(2654.99,-1496.38) 2654.99,-1791.38 ; R122.1@2846.99,-1781.38 2664.99,-1781.38 2654.99,-1791.38
UD+: U12.5 U23.3 | length 4108.6
  Top Layer w10: v1(1364.99,-471.38) 1364.99,58.62 1379.99,73.62 U12.5@1420.99,73.62
  Bottom Layer w10: U23.3@77,-3016.38 77,-2878.39 77,-1659.37 267.99,-1468.38 982.99,-1468.38 1364.99,-1086.38 1364.99,-562.34 1341.99,-539.34 1341.99,-504.38 1364.99,-481.38 v1(1364.99,-471.38)
UD-: U12.6 U23.2 | length 4109
  Top Layer w10: v1(1324.99,-446.38) 1324.99,68.62 1379.99,123.62 U12.6@1420.99,123.62
  Bottom Layer w10: U23.2@44.99,-2943.98 U23.2@44.99,-2941.58 ; U23.2@45.5,-2941.58 45.5,-2576.89 44.99,-2576.38 44.99,-1651.38 244.99,-1451.38 975.95,-1451.38 1347.99,-1079.34 1347.99,-830.38 1346.99,-829.38 1346.99,-568.38 1324.99,-546.38 v1(1324.99,-446.38)
USART3_RX: U1.78 U12.2 | length 936.1
  Top Layer w10: U12.2@1420.99,-76.38 1454.99,-76.38 1469.99,-91.38 1469.99,-161.38 1414.99,-216.38 1414.99,-468.65 1726.66,-780.32 U1.78@1766.68,-780.32
USART3_TX: U1.77 U12.3 | length 960.9
  Top Layer w10: U12.3@1420.99,-26.38 1449.99,-26.38 1486.99,-63.38 1486.99,-168.42 1431.99,-223.42 1431.99,-461.61 1731.01,-760.63 U1.77@1766.68,-760.63
V_1: C6_1.1 P1_1.8 P17.2 Q1_1.1 Q1_1.5 Q1_1.6 U1_1.31 | length 2183.9
  Top Layer w10: v1(609.99,143.62) 691.39,143.62 765.46,69.54 765.46,53.62 ; U1_1.31@765.15,-42.92 765.15,53.62
  Bottom Layer w10: v1(609.99,143.62) 609.99,73.62 629.99,53.62 684.99,53.62 709.99,78.62 729.99,78.62 749.99,58.62 749.99,28.62 734.99,13.62 734.99,-174.77 C6_1.1@699.99,-209.77
  Bottom Layer w40: Q1_1.1@609.99,161.73 609.99,218.91 509.99,318.91 Q1_1.6@509.99,366.45 Q1_1.5@459.99,366.45 369.99,456.45 P1_1.8@369.99,603.62 369.99,613.62 519.99,763.62 919.99,763.62 959.99,803.62 P17.2@959.99,913.62
V_2: C50.1 P10.8 P18.2 Q6.1 Q6.5 Q6.6 U15.31 | length 2116.3
  Top Layer w10: v1(3560.46,208.15) 3605.46,208.15 3705.94,107.67 3705.94,92.67 ; U15.31@3705.62,-1.5 3705.62,92.67
  Bottom Layer w10: Q6.1@3560.46,216.26 v1(3560.46,208.15) 3560.46,193.15 3540.46,173.15 3540.46,103.15 3600.46,43.15 3600.46,-91.85 3640.46,-131.85 C50.1@3640.46,-138.35
  Bottom Layer w40: Q6.1@3560.46,216.26 3560.46,263.8 3460.46,363.8 Q6.6@3460.46,420.98 Q6.5@3410.46,420.98 3414.99,425.51 3414.99,603.62 3434.99,623.62 P10.8@3534.99,623.62 3534.99,703.62 3589.99,758.62 4049.99,758.62 4119.99,828.62 P18.2@4119.99,918.62
V_3: C62.1 P12.8 P19.2 Q9.1 Q9.5 Q9.6 U17.31 | length 2073.2
  Top Layer w10: U17.31@3630.35,-981.54 3718.47,-981.54 3804.99,-895.02 v1(3804.99,-886.38)
  Bottom Layer w10: C62.1@3475.99,-918.88 3502.49,-918.88 3534.99,-886.38 3639.99,-886.38 3676.99,-849.38 3809.87,-849.38 ; v1(3804.99,-886.38) 3804.99,-854.26 3809.87,-849.38 ; Q9.1@3827.87,-831.38 3809.87,-849.38
  Bottom Layer w40: Q9.1@3827.87,-831.38 3875.41,-831.38 3975.41,-731.38 Q9.6@4032.59,-731.38 ; Q9.5@4032.59,-681.38 Q9.6@4032.59,-731.38 ; P19.2@4534.99,-1456.38 4409.99,-1456.38 4389.99,-1436.38 4389.99,-921.38 4304.99,-836.38 P12.8@4239.99,-836.38 4239.99,-791.38 4179.99,-731.38 Q9.6@4032.59,-731.38
V_4: C74.1 P14.8 P20.2 Q12.1 Q12.5 Q12.6 U20.31 | length 2153.4
  Top Layer w10: v1(514.99,-1106.38) 514.99,-1041.38 530.15,-1026.22 U20.31@710.27,-1026.22
  Bottom Layer w10: Q12.1@494.99,-1106.38 v1(514.99,-1106.38) 539.99,-1106.38 569.99,-1136.38 809.99,-1136.38 849.99,-1096.38 C74.1@861.49,-1096.38
  Bottom Layer w40: P20.2@-255.01,-886.38 -180.01,-886.38 -120.01,-946.38 -120.01,-1436.38 -75.01,-1481.38 P14.8@59.99,-1481.38 104.99,-1481.38 290.27,-1296.11 Q12.5@290.27,-1256.38 Q12.6@290.27,-1206.38 339.99,-1206.38 439.99,-1106.38 Q12.1@494.99,-1106.38
V_d: C87.1 P8.2 P16.2 Q15.1 Q15.5 Q15.6 U22.31 | length 2411.2
  Top Layer w10: v1(2689.99,164.31) 2709.84,164.31 2815.15,59 U22.31@2815.15,-31.42
  Top Layer w40: P8.2@3059.99,618.62 3064.99,623.62 P16.2@3064.99,923.62
  Bottom Layer w10: v1(2689.99,164.31) 2689.99,130.12 2634.99,75.12 2634.99,15.12 2709.99,-59.88 2709.99,-131.38 C87.1@2744.99,-166.38
  Bottom Layer w40: v1(2689.99,164.31) Q15.1@2689.99,173.5 2689.99,225.12 2589.99,325.12 Q15.6@2589.99,378.23 Q15.5@2539.99,378.23 2359.99,558.23 2359.99,663.62 2409.99,713.62 2999.99,713.62 3059.99,653.62 P8.2@3059.99,618.62
W_1: C7_1.1 P1_1.4 P17.3 Q2_1.1 Q2_1.5 Q2_1.6 U1_1.28 | length 1413.9
  Top Layer w10: U1_1.28@824.2,-42.92 824.2,43.3 824.52,43.62 824.52,43.93 844.99,64.41 v1(844.99,68.62) v1(844.99,128.62)
  Top Layer w40: P1_1.4@769.99,603.62 769.99,683.62 859.99,773.62 P17.3@859.99,913.62
  Bottom Layer w10: C7_1.1@776.57,-209.77 781.6,-209.77 814.99,-176.38 814.99,38.62 v1(844.99,68.62) ; v1(844.99,128.62) Q2_1.1@844.99,161.73
  Bottom Layer w40: Q2_1.5@694.99,366.45 Q2_1.6@744.99,366.45 ; P1_1.4@769.99,603.62 769.99,463.62 744.99,438.62 Q2_1.6@744.99,366.45 ; Q2_1.1@844.99,161.73 844.99,218.91 744.99,318.91 Q2_1.6@744.99,366.45
W_2: C51.1 P10.4 P18.3 Q7.1 Q7.5 Q7.6 U15.28 | length 1563.8
  Top Layer w10: U15.28@3764.68,-1.5 3764.68,92.36 v1(3770.46,98.15) 3770.46,118.15 v1(3810.46,158.15)
  Top Layer w40: P10.4@3934.99,623.62 3934.99,738.62 4019.99,823.62 P18.3@4019.99,918.62
  Bottom Layer w10: C51.1@3717.96,-153.35 3754.46,-116.85 3754.46,77.15 3770.46,93.15 v1(3770.46,98.15) ; v1(3810.46,158.15) Q7.1@3810.46,216.26
  Bottom Layer w40: Q7.1@3810.46,216.26 3810.46,263.8 3784.7,289.56 3784.05,289.56 3710.46,363.15 Q7.6@3710.46,420.98 Q7.5@3660.46,420.98 3660.46,503.15 3700.94,543.62 3889.99,543.62 3934.99,588.62 P10.4@3934.99,623.62
W_3: C63.1 P12.4 P19.3 Q10.1 Q10.5 Q10.6 U17.28 | length 1524.9
  Top Layer w10: U17.28@3630.35,-1040.59 3719.2,-1040.59 v1(3729.99,-1051.38) 3767.49,-1088.88 v1(3799.99,-1088.88)
  Top Layer w40: P12.4@4239.99,-1236.38 4329.99,-1236.38 4449.99,-1356.38 P19.3@4534.99,-1356.38
  Bottom Layer w10: C63.1@3475.99,-992.38 C63.1@3475.99,-988.88 3508.49,-1021.38 3699.99,-1021.38 v1(3729.99,-1051.38)
  Bottom Layer w40: Q10.1@3827.87,-1088.88 3882.49,-1088.88 3982.49,-988.88 Q10.6@4032.59,-988.88 ; Q10.5@4032.59,-938.88 Q10.6@4032.59,-988.88 ; P12.4@4239.99,-1236.38 4189.99,-1236.38 4159.99,-1206.38 4159.99,-1033.88 4114.99,-988.88 Q10.6@4032.59,-988.88
W_4: C75.1 P14.4 P20.3 Q13.1 Q13.5 Q13.6 U20.28 | length 1483.1
  Top Layer w10: v1(523.74,-863.88) 532.49,-863.88 v1(584.14,-915.53) 635.78,-967.17 U20.28@710.27,-967.17
  Top Layer w40: P20.3@-255.01,-986.38 -150.01,-986.38 -55.01,-1081.38 P14.4@59.99,-1081.38
  Bottom Layer w10: v1(584.14,-915.53) 664.99,-996.38 828.99,-996.38 C75.1@861.49,-1028.88
  Bottom Layer w40: P14.4@59.99,-1081.38 94.99,-1081.38 212.49,-963.88 Q13.6@290.27,-963.88 ; Q13.5@290.27,-1013.88 Q13.6@290.27,-963.88 ; Q13.1@494.99,-863.88 442.49,-863.88 342.49,-963.88 Q13.6@290.27,-963.88
W_d: C88.1 P8.3 P16.3 Q16.1 Q16.5 Q16.6 U22.28 | length 1362.6
  Top Layer w10: U22.28@2874.2,-31.42 2874.2,49.33 v1(2884.99,60.12) 2939.99,115.12 v1(2939.99,140.12)
  Top Layer w40: P8.3@2959.99,618.62 2964.99,623.62 P16.3@2964.99,923.62
  Bottom Layer w10: C88.1@2817.49,-181.38 2848.99,-149.88 2848.99,24.12 v1(2884.99,60.12)
  Bottom Layer w40: Q16.5@2787.49,378.23 Q16.6@2837.49,378.23 ; Q16.1@2937.49,173.5 2937.49,222.62 2837.49,322.62 Q16.6@2837.49,378.23 ; P8.3@2959.99,618.62 2959.99,590.12 2837.49,467.62 Q16.6@2837.49,378.23
pads on no net: header1*6pin.3 P2_1.2 P11.2 P13.2 P15.2 U1.1 U1.2 U1.3 U1.4 U1.12 U1.13 U1.14 U1.26 U1.29 U1.41 U1.46 U1.47 U1.53 U1.56 U1.57 U1.67 U1.70 U1.97 U1.101 U1.118 U1.140 U1_1.1 U1_1.7 U1_1.13 U1_1.37 U1_1.44 U1_1.47 U1_1.48 U4.1 U4.8 U6.0 U11.5 U11.12 U12.8 U12.9 U12.10 U12.11 U12.12 U12.13 U12.14 U12.15 U14.5 U14.12 U15.1 U15.7 U15.13 U15.37 U15.44 U15.47 U15.48 U16.5 U16.12 U17.1 U17.7 U17.13 U17.37 U17.44 U17.47 U17.48 U19.5 U19.12 U20.1 U20.7 U20.13 U20.37 U20.44 U20.47 U20.48 U22.1 U22.13 U22.19 U22.37 U22.47 U22.48 U23.0 U23.1 U23.4 U25.3 U25.4 U25.6 U25.7 U25.8 U25.9 U25.16 U25.18 U25.19

## Polygon pours and split planes (outlines as drawn)
+3.3V on POWER (split plane): 4069.9,-1846.38 4070.28,-1850.3 4071.43,-1854.07 4073.28,-1857.55 4075.78,-1860.59 4078.83,-1863.09 4082.3,-1864.95 4086.07,-1866.09 4089.99,-1866.48 4700.5,-1866.48 4700.5,-2807.59 4700.88,-2811.51 4701.64,-2814.01 4504.35,-3011.3 3887.07,-3011.3 3883.15,-3011.69 3879.38,-3012.83 3875.9,-3014.69 3872.86,-3017.19 3499.14,-3390.9 2551.1,-3390.9 263.24,-3390.9 -339.91,-2787.75 -339.91,-1631.48 279.99,-1631.48 283.91,-1631.09 287.68,-1629.95 291.16,-1628.09 294.2,-1625.59 296.7,-1622.55 298.56,-1619.07 299.7,-1615.3 300.09,-1611.38 300.09,463.52 4069.9,463.52
+5V on POWER (split plane): 230 vertices, not listed, extent -699.93,-2774.96 5077.89,1329.02
no net on POWER (split plane): 824.91,-3236.3 480.08,-3236.3 480.08,-2761.47 824.91,-2761.47
no net on POWER (split plane): 2229.91,-2626.3 1370.08,-2626.3 1370.08,-1776.47 2229.91,-1776.47
+16V on POWER (split plane): 4700.5,944.69 4700.5,-1826.29 4110.09,-1826.29 4110.09,483.62 4109.7,487.54 4108.56,491.31 4106.7,494.78 4104.2,497.83 4101.16,500.33 4097.68,502.18 4093.91,503.33 4089.99,503.71 279.99,503.71 276.07,503.33 272.3,502.18 268.83,500.33 265.78,497.83 263.28,494.78 261.43,491.31 260.28,487.54 259.9,483.62 259.9,-1591.29 -339.91,-1591.29 -339.91,880.29 -201.68,1018.52 4626.67,1018.52
GND on GROUND (split plane): 216 vertices, not listed, extent -699.93,-3390.9 5077.89,1329.02
GND on GROUND (split plane): 824.91,-3236.3 480.08,-3236.3 480.08,-2761.47 824.91,-2761.47
GND on GROUND (split plane): 2229.91,-2626.3 1370.08,-2626.3 1370.08,-1776.47 2229.91,-1776.47

## Keep-outs
Keep-Out Layer:
  lines w0: 5092.12,-1807.02 5092.97,-2451
  lines w10: -715.45,-1795.8 ccw(c-773.28,-1659.57) -715.45,-1523.33 ; -715.01,-1795.98 -715.01,-2433.98 -505.01,-2643.98 ; -715.01,-1523.98 -715.01,841.5 -216.61,1339.9 -215.01,1339.9 ; -515.01,-2633.98 -505.01,-2643.98 ; -216.57,1339.94 -159.07,1339.94 ccw(c-10.01,1340.07) 139.06,1340.2 142.65,1343.8 4347.92,1343.8 ccw(c4499.99,1343.62) 4652.06,1344.07 ; 254.99,-3405.98 2551.1,-3405.98 3504.99,-3405.98 3505.39,-3405.98 3884.99,-3026.38 4510.59,-3026.38 4710.99,-2825.98 4894.99,-2641.98 ; 255.99,-3404.98 -323.01,-2825.98 -505.01,-2643.98 ; 4652.09,1344.1 4696.9,1344.1 5006.49,1034.52 ; 4985.25,1052.23 cw(c4727.24,755.06) 5092.2,902.31 ; 5092.42,-1522.02 ccw(c5132.24,-1664.57) 5092.12,-1807.02 5092.97,-2451 ; 5092.97,-1522.02 5092.97,902.31 ; 4894.99,-2641.96 5092.97,-2443.98 ; 4894.99,-2641.96 5092.97,-2443.98 ; 4894.99,-2641.96 5092.97,-2443.98 ; 4894.99,-2641.98 4894.99,-2641.96

## Other copper
Top Layer:
  region net +3.3V: 1904.99,303.62 1904.99,463.62 1639.99,463.62 1639.99,303.62
  rectangle net +5V: -540.01,718.62 -380.01,983.62
POWER (plane layer: these items are gaps in the copper):
  lines w10: 774.99,-1451.38 784.99,-1441.38 ; 4715.59,-1846.38 4720.59,-1851.38
  lines w20: 469.99,-3246.38 834.99,-3246.38 834.99,-2751.38 469.99,-2751.38 469.99,-3246.38 ; 1359.99,-2636.38 2239.99,-2636.38 2239.99,-1766.38 1359.99,-1766.38 1359.99,-2636.38
  lines w40: -360.01,-2796.08 -360.01,888.62 -210.01,1038.62 4634.99,1038.62 4720.59,953.02 4720.59,-2807.59 ; -360.01,-1446.38 -360.01,-1611.38 279.99,-1611.38 279.99,483.62 4089.99,483.62 4089.99,-1846.38 4715.59,-1846.38
GROUND (plane layer: these items are gaps in the copper):
  lines w10: 2234.99,-1766.38 2239.99,-1771.38
  lines w20: 2234.99,-1766.38 1359.99,-1766.38 1359.99,-2636.38 2239.99,-2636.38 2239.99,-1771.38 ; 469.99,-3246.38 469.99,-2751.38 834.99,-2751.38 834.99,-3246.38 469.99,-3246.38

## Silkscreen, mask and mechanical layers (free items; w line width, h text height)
Top Overlay:
  circle w10: c2192.72,-768.19 r3385.83
  text "MOTOR 1" at 354.99,1243.62 h60
  text "5V" at 3434.99,1183.62 h60
  text "MOTOR 2" at 3954.99,1143.62 h60
  text "MOTOR 4" at -555.01,-676.38 h60 r270
  text "MOTOR 3" at 4814.99,-1106.38 h60 r90
  text "BOOT_DONE" at 1109.99,-1472.38 h40
  text "RX_2401" at 3704.99,-2931.38 h40
  text "NUM" at 2399.99,-3365.08 h40 r90
  text "TX_FREQ" at 1244.99,-3375.08 h40 r90
  text "RX_FREQ" at 1819.99,-3375.08 h40 r90
  text "MODE" at 2984.99,-3375.08 h40 r90
  text "HEART" at 319.99,-3395.08 h40
  text "TX_COMM" at 544.99,-3395.08 h40
  text "RX_COMM" at 854.99,-3395.08 h40
Mechanical 1:
  lines w10: -715.45,-1795.8 ccw(c-773.28,-1659.57) -715.45,-1523.33 ; -214.31,1342.2 -715.01,841.5 ; -212.06,1339.95 -157.13,1339.95 ccw(c-10.01,1340.07) 137.11,1340.2 ; 140.73,1343.81 4348.56,1343.81 ccw(c4499.99,1343.94) 4651.42,1344.07 4693.07,1344.07 ; 255.54,-3405.08 3506.29,-3405.08 ; 255.54,-3404.53 -715.01,-2433.98 ; 3504.99,-3405.08 3506.29,-3405.08 ; 4693.11,1344.11 5017.6,1019.62 ; 5017.05,1019 cw(c4846.99,824.02) 5093.99,901.02 ; 5092.12,-1802.02 cw(c5132.24,-1659.57) 5092.42,-1517.02 5092.42,899.45 ; 5092.97,-2327.13 5092.97,-1802.02 ; 5092.97,-2278.98 5092.97,-2446 ; -715.01,-2433.98 -715.01,-1795.98 -715.01,-2433.98 ; -715.01,841.5 -715.01,-1523.98 -715.01,841.5 ; 3506.29,-3405.08 3887.39,-3023.98 4514.99,-3023.98 4742.99,-2795.98 ; 4742.99,-2795.98 5092.97,-2446 ; 4742.99,-2795.98 5092.97,-2446

## Text inside footprints (layer, text, board x,y; h text height)
C38: Top Overlay "-" at 1698.42,1163.62 h60 r180; Top Overlay "+" at 2203.42,1158.62 h60 r180
C92: Top Overlay "-" at 4844.99,-2531.38 h60 r270; Top Overlay "+" at 4849.99,-2026.38 h60 r270
C107: Top Overlay "-" at 1699.99,738.62 h60 r180; Top Overlay "+" at 2204.99,733.62 h60 r180
C108: Top Overlay "-" at 4424.99,-2381.38 h60 r270; Top Overlay "+" at 4429.99,-1876.38 h60 r270
C109: Top Overlay "-" at 4969.99,848.62 h60; Top Overlay "+" at 4464.99,853.62 h60
C112: Top Overlay "-" at 1429.99,1375.19 h60 r90; Top Overlay "+" at 1424.99,870.19 h60 r90
J: Top Overlay "2" at 861.99,-2463.38 h30 r270; Top Overlay "1" at 995.99,-2472.38 h30 r270; Top Overlay "9" at 1004.99,-1881.38 h30 r270
U2: Top Overlay "*" at 3028.49,-1808.63 h50; Mechanical 13 "*" at 3073.99,-1853.88 h50
U11: Top Overlay "*" at 1191.49,-516.38 h50; Mechanical 13 "*" at 1233.99,-581.38 h50
U12: Top Overlay "*" at 1443.49,-141.38 h50 r180; Mechanical 13 "*" at 1397.49,-104.88 h50 r180
U13: Top Overlay "*" at 334.99,-143.88 h50 r270; Mechanical 13 "*" at 298.49,-189.88 h50 r270
U14: Top Overlay "*" at 3548.49,-501.38 h50 r180; Mechanical 13 "*" at 3505.99,-436.38 h50 r180
U16: Top Overlay "*" at 3169.99,-1007.88 h50 r270; Mechanical 13 "*" at 3104.99,-1050.38 h50 r270
U18: Top Overlay "*" at 4124.99,-659.88 h50 r90; Mechanical 13 "*" at 4161.49,-613.88 h50 r90
U19: Top Overlay "*" at 1211.49,-901.38 h50; Mechanical 13 "*" at 1253.99,-966.38 h50
U21: Top Overlay "*" at 2578.49,-486.38 h50 r180; Mechanical 13 "*" at 2535.99,-421.38 h50 r180